# EAGLE board Universal Bicore (rev A) - 1x3 panelized (EAGLE 6.4)
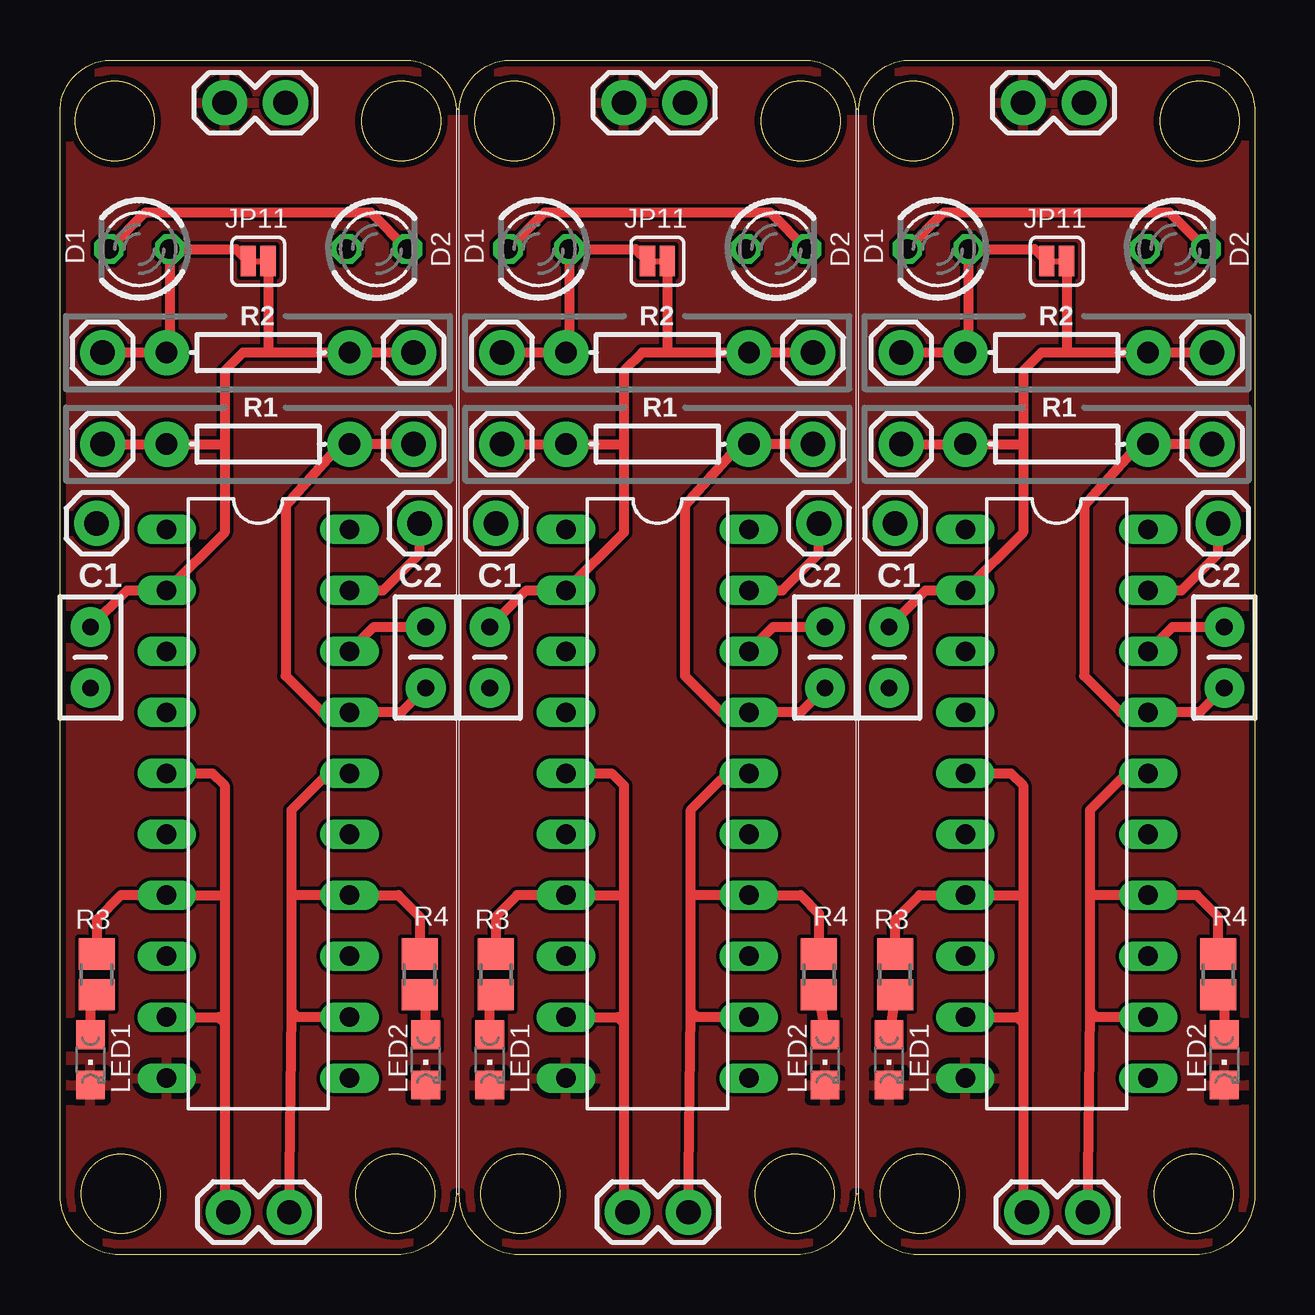
[diagram p0: board, top side]
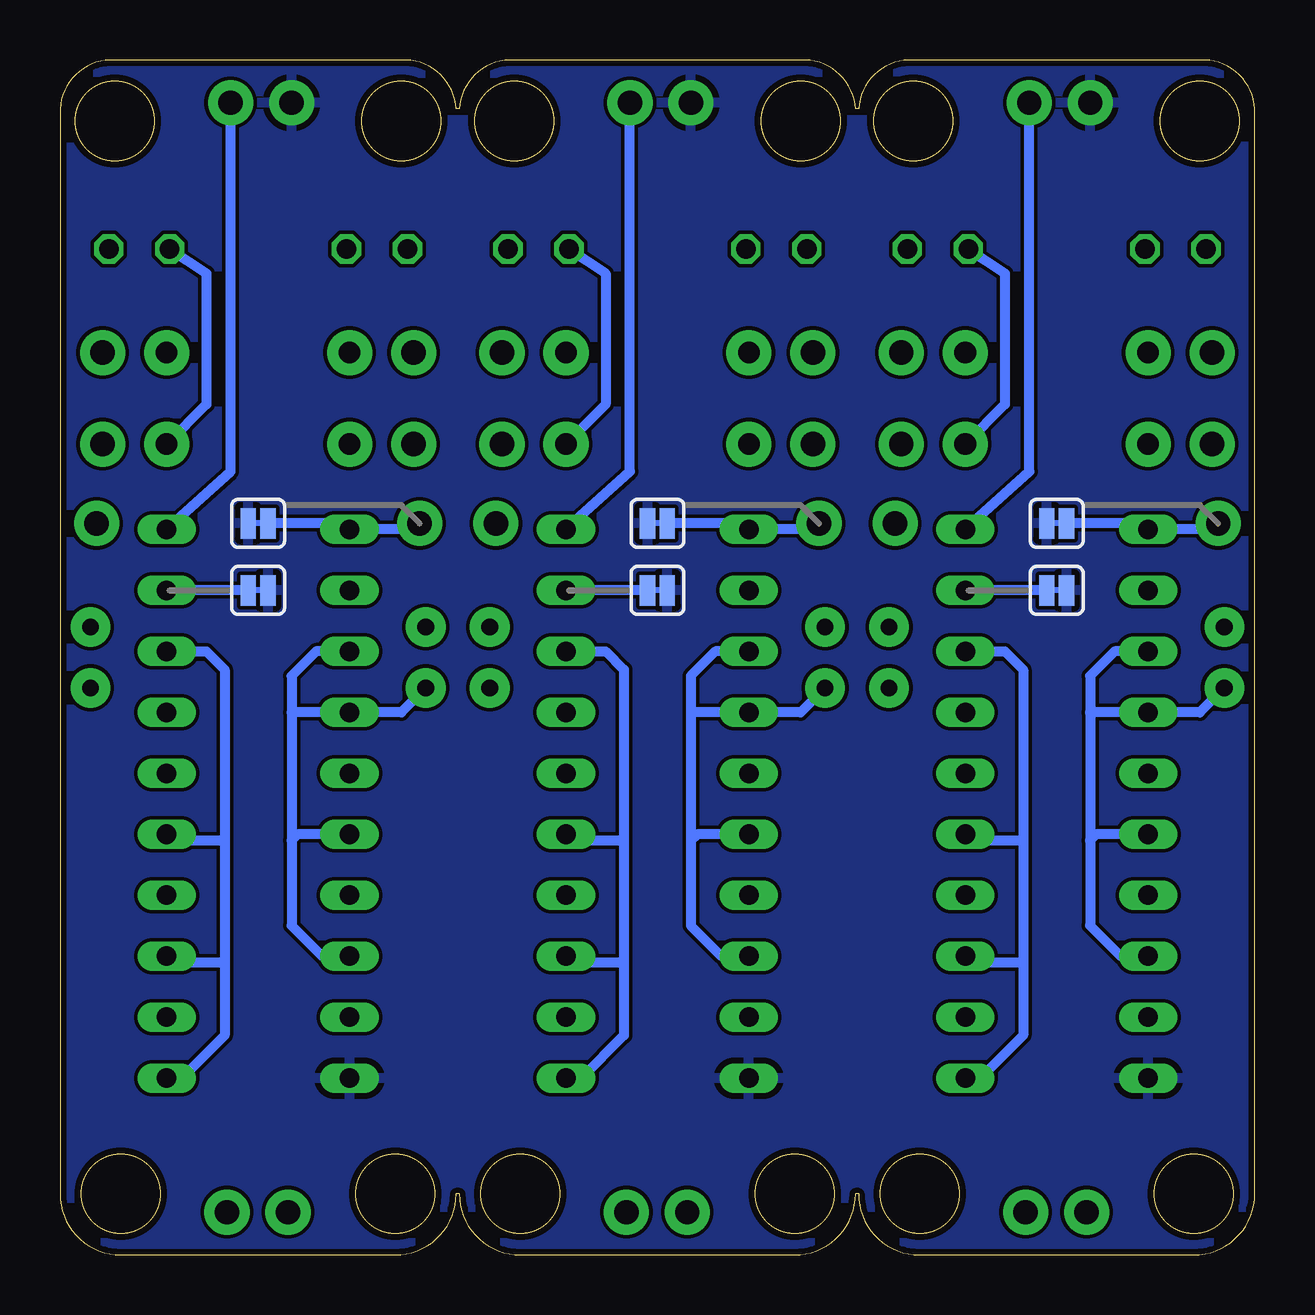
[diagram p1: board, bottom side, seen from below]

Size 49.78 x 49.79 mm. Coordinates in mm from the lower left corner, seen from the top.
Outline: 0,47.75 arc-90 2.29,49.78 14.22,49.78 arc-90 16.51,47.75 16.64,47.75 arc-90 18.92,49.78 30.86,49.78 arc-90 33.15,47.75 33.27,47.75 arc-90 35.56,49.78 47.5,49.78 arc-90 49.78,47.75 49.78,2.54 arc-90 47.24,0 35.81,0 arc-90 33.27,2.54 33.15,2.54 arc-90 30.61,0 19.18,0 arc-90 16.64,2.54 16.51,2.54 arc-90 13.97,0 2.54,0 arc-90 0,2.54 0,47.75
Outline: circle at 2.54,2.54 radius 1.65
Outline: circle at 13.97,2.54 radius 1.65
Outline: circle at 14.22,47.24 radius 1.65
Outline: circle at 2.29,47.24 radius 1.65
Outline: circle at 35.81,2.54 radius 1.65
Outline: circle at 47.24,2.54 radius 1.65
Outline: circle at 47.5,47.24 radius 1.65
Outline: circle at 35.56,47.24 radius 1.65
Outline: circle at 19.18,2.54 radius 1.65
Outline: circle at 30.61,2.54 radius 1.65
Outline: circle at 30.86,47.24 radius 1.65
Outline: circle at 18.92,47.24 radius 1.65
Copper layers (1*2*15*16): Top 0.035mm / dielectric 0.2mm / layer 2 0.0175mm / dielectric 1.1mm / layer 15 0.0175mm / dielectric 0.2mm / Bottom 0.035mm
Design rules "SeeedStudio_DRU_no_angle_20130527": minimum track width 6mil, minimum drill 12mil, track to track 6mil, track to pad 6mil, pad to pad 6mil, via to via 6mil, smd to smd 0mil, copper to edge 10mil, drill to drill 10mil, minimum pad ring 6mil, minimum via ring 6mil, stop-mask expansion 2mil, vias tented up to drill 25mil, thermal gap 10mil

## Footprints (pad centres in the part's own frame; a part is rotated, then mirrored left to right if it is on the bottom)
CAP-PTH-SMALLEZ = drill 0.7 pad 1.651: 1 0,0; 2 2.54,0
LED3MM = drill 0.813 octagon: A -1.27,0; K 1.27,0
DIL20 = drill 0.813 long: 1 -11.43,-3.81; 2 -8.89,-3.81; 3 -6.35,-3.81; 4 -3.81,-3.81; 5 -1.27,-3.81; 6 1.27,-3.81; 7 3.81,-3.81; 8 6.35,-3.81; 9 8.89,-3.81; 10 11.43,-3.81; 11 11.43,3.81; 12 8.89,3.81; 13 6.35,3.81; 14 3.81,3.81; 15 1.27,3.81; 16 -1.27,3.81; 17 -3.81,3.81; 18 -6.35,3.81; 19 -8.89,3.81; 20 -11.43,3.81
1X02 = drill 1.016 pad 1.88: 1 0,0; 2 2.54,0
1X01 = drill 1.016 pad 1.88: 1 0,0
SJ_2S = smd 0.635 x 1.27: 1 -0.412,0; 2 0.412,0
CHIPLED_0805 = smd 1.2 x 1.2: A 0,-1.05; C 0,1.05
AXIAL-0.3EZ = drill 0.9 pad 1.88: P$1 -3.81,0; P$2 3.81,0
R0805 = smd 1.3 x 1.5: 1 -0.85,0; 2 0.85,0

## Placement (x,y rotation side)
C1  .22uF  [CAP-PTH-SMALLEZ]  1.27,26.16 270 top
C2  .22uF  [CAP-PTH-SMALLEZ]  15.24,26.16 270 top
C3  .22uF  [CAP-PTH-SMALLEZ]  34.54,26.16 270 top
C4  .22uF  [CAP-PTH-SMALLEZ]  48.51,26.16 270 top
C5  .22uF  [CAP-PTH-SMALLEZ]  17.91,26.16 270 top
C6  .22uF  [CAP-PTH-SMALLEZ]  31.88,26.16 270 top
D1  [LED3MM]  3.3,41.91 180 top
D2  [LED3MM]  13.21,41.91 0 top
D3  [LED3MM]  36.58,41.91 180 top
D4  [LED3MM]  46.48,41.91 0 top
D5  [LED3MM]  19.94,41.91 180 top
D6  [LED3MM]  29.84,41.91 0 top
IC1  74HCT240N  [DIL20]  8.26,18.8 270 top
IC2  74HCT240N  [DIL20]  41.53,18.8 270 top
IC3  74HCT240N  [DIL20]  24.89,18.8 270 top
JP1  [1X02]  9.4,48.01 180 top
JP2  OUTPUT  [1X02]  9.55,1.78 180 top
JP3  [1X01]  1.78,33.78 0 top
JP4  [1X01]  14.73,33.78 0 top
JP5  [1X01]  1.78,37.59 0 top
JP6  [1X01]  14.73,37.59 90 top
JP7  [1X01]  1.52,30.48 0 top
JP8  [1X01]  14.99,30.48 90 top
JP9  [SJ_2S]  8.26,30.48 0 bottom
JP10  [SJ_2S]  8.26,27.69 180 bottom
JP11  [SJ_2S]  8.26,41.4 0 top
JP12  [1X02]  42.67,48.01 180 top
JP13  OUTPUT  [1X02]  42.82,1.78 180 top
JP14  [1X01]  35.05,33.78 0 top
JP15  [1X01]  48.01,33.78 0 top
JP16  [1X01]  35.05,37.59 0 top
JP17  [1X01]  48.01,37.59 90 top
JP18  [1X01]  34.8,30.48 0 top
JP19  [1X01]  48.26,30.48 90 top
JP20  [SJ_2S]  41.53,30.48 0 bottom
JP21  [SJ_2S]  41.53,27.69 180 bottom
JP22  [SJ_2S]  41.53,41.4 0 top
JP23  [1X02]  26.04,48.01 180 top
JP24  OUTPUT  [1X02]  26.19,1.78 180 top
JP25  [1X01]  18.41,33.78 0 top
JP26  [1X01]  31.37,33.78 0 top
JP27  [1X01]  18.41,37.59 0 top
JP28  [1X01]  31.37,37.59 90 top
JP29  [1X01]  18.16,30.48 0 top
JP30  [1X01]  31.62,30.48 90 top
JP31  [SJ_2S]  24.89,30.48 0 bottom
JP32  [SJ_2S]  24.89,27.69 180 bottom
JP33  [SJ_2S]  24.89,41.4 0 top
LED1  [CHIPLED_0805]  1.27,8.13 180 top
LED2  [CHIPLED_0805]  15.24,8.13 180 top
LED3  [CHIPLED_0805]  34.54,8.13 180 top
LED4  [CHIPLED_0805]  48.51,8.13 180 top
LED5  [CHIPLED_0805]  17.91,8.13 180 top
LED6  [CHIPLED_0805]  31.88,8.13 180 top
R1  [AXIAL-0.3EZ]  8.26,33.78 180 top
R2  [AXIAL-0.3EZ]  8.26,37.59 0 top
R3  470  [R0805]  1.52,11.68 90 top
R4  470  [R0805]  14.99,11.68 90 top
R5  [AXIAL-0.3EZ]  41.53,33.78 180 top
R6  [AXIAL-0.3EZ]  41.53,37.59 0 top
R7  470  [R0805]  34.8,11.68 90 top
R8  470  [R0805]  48.26,11.68 90 top
R9  [AXIAL-0.3EZ]  24.89,33.78 180 top
R10  [AXIAL-0.3EZ]  24.89,37.59 0 top
R11  470  [R0805]  18.16,11.68 90 top
R12  470  [R0805]  31.62,11.68 90 top

## Library data of the parts
C1-C6 = SparkFun-Capacitors
D1-D6 LED1-LED6 = led
IC1-IC3 = 74xx-eu
JP1-JP8 JP12-JP19 JP23-JP30 = SparkFun-Connectors
JP9-JP11 JP20-JP22 JP31-JP33 = SparkFun-Passives
R1 R2 R5 R6 R9 R10 = SparkFun-Resistors
R3 R4 R7 R8 R11 R12 = resistor

## Nets
GND: IC1.10 IC2.10 IC3.10 JP1.2 JP9.1 JP10.1 JP12.2 JP20.1 JP21.1 JP23.2 JP31.1 JP32.1 LED1.C LED2.C LED3.C LED4.C LED5.C LED6.C
N$1: C1.1 IC1.2 JP3.1 JP6.1 JP11.2 R1.P$2 R2.P$2
N$2: C1.2 IC1.3 IC1.4 IC1.6 IC1.8
N$3: IC1.12 IC1.14 IC1.16 JP2.1 R4.2
N$4: C2.1 IC1.11 IC1.13 IC1.15 IC1.18
N$5: C2.2 D2.A IC1.17 JP4.1 R1.P$1
N$6: IC1.5 IC1.7 IC1.9 JP2.2 R3.2
N$7: D1.A JP5.1 JP11.1 R2.P$1
N$8: D1.K D2.K
N$9: LED2.A R4.1
N$10: LED1.A R3.1
N$11: IC1.1 JP7.1 JP9.2
N$12: IC1.19 JP8.1 JP10.2
N$16: C3.1 IC2.2 JP14.1 JP17.1 JP22.2 R5.P$2 R6.P$2
N$17: C3.2 IC2.3 IC2.4 IC2.6 IC2.8
N$18: C4.1 IC2.11 IC2.13 IC2.15 IC2.18
N$19: C4.2 D4.A IC2.17 JP15.1 R5.P$1
N$20: IC2.12 IC2.14 IC2.16 JP13.1 R8.2
N$21: IC2.5 IC2.7 IC2.9 JP13.2 R7.2
N$22: D3.A JP16.1 JP22.1 R6.P$1
N$23: D3.K D4.K
N$24: LED4.A R8.1
N$25: LED3.A R7.1
N$26: IC2.19 JP19.1 JP21.2
N$27: IC2.1 JP18.1 JP20.2
N$31: C5.1 IC3.2 JP25.1 JP28.1 JP33.2 R9.P$2 R10.P$2
N$32: C5.2 IC3.3 IC3.4 IC3.6 IC3.8
N$33: C6.1 IC3.11 IC3.13 IC3.15 IC3.18
N$34: C6.2 D6.A IC3.17 JP26.1 R9.P$1
N$35: IC3.12 IC3.14 IC3.16 JP24.1 R12.2
N$36: IC3.5 IC3.7 IC3.9 JP24.2 R11.2
N$37: D5.A JP27.1 JP33.1 R10.P$1
N$38: D5.K D6.K
N$39: LED6.A R12.1
N$40: LED5.A R11.1
N$41: IC3.19 JP30.1 JP32.2
N$42: IC3.1 JP29.1 JP31.2
VCC: IC1.20 JP1.1
VCC1: IC2.20 JP12.1
VCC2: IC3.20 JP23.1

## Tracks (layer width: path | path; a pad name or v marks a point on that pad's centre or on a via)
GND
  pour Top: -0.51,-0.51 50.29,-0.51 50.29,50.29 -0.51,50.29
  pour Bottom: -0.51,-0.51 50.29,-0.51 50.29,50.29 -0.51,50.29
N$1
  Top 0.406: JP6.1 R2.P$2 8.64,37.59 | JP3.1 R1.P$2 6.86,33.78 | C1.1 2.79,27.69 IC1.2 6.86,30.1 6.86,33.78 | 8.64,37.59 7.62,37.59 6.86,36.83 6.86,33.78 | JP11.2 8.67,37.62 8.64,37.59
N$2
  Bottom 0.406: 6.86,22.61 6.86,24.13 5.84,25.15 IC1.3 | 6.86,22.61 6.86,17.27 | 6.86,17.27 6.86,13.72 5.59,12.45 IC1.8 | IC1.6 6.6,17.53 6.86,17.27 | 6.86,22.61 IC1.4 2.29,22.61 C1.2
N$3
  Top 0.406: JP2.1 9.65,10.16 | 9.65,10.16 9.65,14.99 | 9.65,14.99 9.65,18.54 10.92,19.81 11.81,19.81 IC1.16 | 9.65,14.99 IC1.14 14.1,14.99 14.99,14.1 R4.2 | IC1.12 9.91,9.91 9.65,10.16
N$4
  Top 0.406: IC1.18 13.08,26.16 C2.1
  Bottom 0.406: IC1.18 10.41,25.15 9.65,24.38 9.65,17.27 | 9.65,17.27 9.65,12.19 | 9.65,12.19 9.65,9.14 11.43,7.37 IC1.11 | IC1.13 11.81,12.19 9.65,12.19 | IC1.15 11.81,17.27 9.65,17.27
N$5
  Top 0.406: JP4.1 R1.P$1 11.68,33.78 9.4,31.24 9.4,24.13 10.92,22.61 IC1.17 14.22,22.61 C2.2
  Bottom 0.406: D2.A 10.41,40.89 10.41,35.43 R1.P$1
N$6
  Top 0.406: 6.86,14.99 6.86,19.56 6.35,20.07 IC1.5 | 6.86,14.99 6.86,9.65 | 6.86,9.65 6.86,2.03 JP2.2 | 6.86,9.65 6.6,9.91 IC1.9 | 6.86,14.99 IC1.7 2.54,14.99 1.52,13.97 R3.2
N$7
  Top 0.406: JP5.1 R2.P$1 4.57,37.72 D1.A 7.33,41.91 JP11.1
N$8
  Top 0.406: D1.K 3.56,43.43 12.95,43.43 D2.K
N$9
  Top 0.406: LED2.A 15.24,10.58 R4.1
N$10
  Top 0.406: R3.1 1.27,10.58 LED1.A
N$11
  Bottom 0.406: JP7.1 1.78,30.23 IC1.1 4.7,30.48 JP9.2
N$12
  Top 0.406: IC1.19 13.46,27.69 14.99,29.21 JP8.1
  Bottom 0.406: JP10.2 IC1.19
N$13
  Bottom 0.254: 7.87,30.48 8.64,30.48
N$14
  Bottom 0.254: 7.87,27.69 8.64,27.69
N$15
  Top 0.254: 8.13,41.4 8.38,41.4
N$16
  Top 0.406: JP17.1 R6.P$2 41.91,37.59 | JP14.1 R5.P$2 40.13,33.78 | C3.1 36.07,27.69 IC2.2 40.13,30.1 40.13,33.78 | 41.91,37.59 40.89,37.59 40.13,36.83 40.13,33.78 | JP22.2 41.94,37.62 41.91,37.59
N$17
  Bottom 0.406: 40.13,22.61 40.13,24.13 39.12,25.15 IC2.3 | 40.13,22.61 40.13,17.27 | 40.13,17.27 40.13,13.72 38.86,12.45 IC2.8 | IC2.6 39.88,17.53 40.13,17.27 | 40.13,22.61 IC2.4 35.56,22.61 C3.2
N$18
  Top 0.406: IC2.18 46.35,26.16 C4.1
  Bottom 0.406: IC2.18 43.69,25.15 42.93,24.38 42.93,17.27 | 42.93,17.27 42.93,12.19 | 42.93,12.19 42.93,9.14 44.7,7.37 IC2.11 | IC2.13 45.09,12.19 42.93,12.19 | IC2.15 45.09,17.27 42.93,17.27
N$19
  Top 0.406: JP15.1 R5.P$1 44.96,33.78 42.67,31.24 42.67,24.13 44.2,22.61 IC2.17 47.5,22.61 C4.2
  Bottom 0.406: D4.A 43.69,40.89 43.69,35.43 R5.P$1
N$20
  Top 0.406: JP13.1 42.93,10.16 | 42.93,10.16 42.93,14.99 | 42.93,14.99 42.93,18.54 44.2,19.81 45.09,19.81 IC2.16 | 42.93,14.99 IC2.14 47.37,14.99 48.26,14.1 R8.2 | IC2.12 43.18,9.91 42.93,10.16
N$21
  Top 0.406: 40.13,14.99 40.13,19.56 39.62,20.07 IC2.5 | 40.13,14.99 40.13,9.65 | 40.13,9.65 40.13,2.03 JP13.2 | 40.13,9.65 39.88,9.91 IC2.9 | 40.13,14.99 IC2.7 35.81,14.99 34.8,13.97 R7.2
N$22
  Top 0.406: JP16.1 R6.P$1 37.85,37.72 D3.A 40.61,41.91 JP22.1
N$23
  Top 0.406: D3.K 36.83,43.43 46.23,43.43 D4.K
N$24
  Top 0.406: R8.1 48.51,10.58 LED4.A
N$25
  Top 0.406: R7.1 LED3.A
N$26
  Top 0.406: IC2.19 46.74,27.69 48.26,29.21 JP19.1
  Bottom 0.406: JP21.2 IC2.19
N$27
  Bottom 0.406: JP18.1 35.05,30.23 IC2.1 37.97,30.48 JP20.2
N$28
  Bottom 0.254: 41.15,30.48 41.91,30.48
N$29
  Bottom 0.254: 41.15,27.69 41.91,27.69
N$30
  Top 0.254: 41.4,41.4 41.66,41.4
N$31
  Top 0.406: JP28.1 R10.P$2 25.27,37.59 | JP25.1 R9.P$2 23.5,33.78 | C5.1 19.43,27.69 IC3.2 23.5,30.1 23.5,33.78 | 25.27,37.59 24.26,37.59 23.5,36.83 23.5,33.78 | JP33.2 25.3,37.62 25.27,37.59
N$32
  Bottom 0.406: 23.5,22.61 23.5,24.13 22.48,25.15 IC3.3 | 23.5,22.61 23.5,17.27 | 23.5,17.27 23.5,13.72 22.23,12.45 IC3.8 | IC3.6 23.24,17.53 23.5,17.27 | 23.5,22.61 IC3.4 18.92,22.61 C5.2
N$33
  Top 0.406: IC3.18 29.72,26.16 C6.1
  Bottom 0.406: IC3.18 27.05,25.15 26.29,24.38 26.29,17.27 | 26.29,17.27 26.29,12.19 | 26.29,12.19 26.29,9.14 28.07,7.37 IC3.11 | IC3.13 28.45,12.19 26.29,12.19 | IC3.15 28.45,17.27 26.29,17.27
N$34
  Top 0.406: JP26.1 R9.P$1 28.32,33.78 26.04,31.24 26.04,24.13 27.56,22.61 IC3.17 30.86,22.61 C6.2
  Bottom 0.406: D6.A 27.05,40.89 27.05,35.43 R9.P$1
N$35
  Top 0.406: JP24.1 26.29,10.16 | 26.29,10.16 26.29,14.99 | 26.29,14.99 26.29,18.54 27.56,19.81 28.45,19.81 IC3.16 | 26.29,14.99 IC3.14 30.86,14.99 31.62,14.22 R12.2 | IC3.12 26.54,9.91 26.29,10.16
N$36
  Top 0.406: 23.5,14.99 23.5,19.56 22.99,20.07 IC3.5 | 23.5,14.99 23.5,9.65 | 23.5,9.65 23.5,2.03 JP24.2 | 23.5,9.65 23.24,9.91 IC3.9 | 23.5,14.99 IC3.7 19.05,14.99 18.16,14.1 R11.2
N$37
  Top 0.406: JP27.1 R10.P$1 21.21,37.72 D5.A 23.97,41.91 JP33.1
N$38
  Top 0.406: D5.K 20.19,43.43 29.59,43.43 D6.K
N$39
  Top 0.406: R12.1 LED6.A
N$40
  Top 0.406: LED5.A 17.91,10.58 R11.1
N$41
  Top 0.406: IC3.19 30.1,27.69 31.62,29.21 JP30.1
  Bottom 0.406: JP32.2 IC3.19
N$42
  Bottom 0.406: JP29.1 18.41,30.23 IC3.1 21.34,30.48 JP31.2
N$43
  Bottom 0.254: 24.51,30.48 25.27,30.48
N$44
  Bottom 0.254: 24.51,27.69 25.27,27.69
N$45
  Top 0.254: 24.77,41.4 25.02,41.4
VCC
  Bottom 0.406: IC1.20 9.4,32.64 JP1.1
VCC1
  Bottom 0.406: IC2.20 42.67,32.64 JP12.1
VCC2
  Bottom 0.406: IC3.20 26.04,32.64 JP23.1

## Text on the board
tPlace: JP11 | JP11 | JP11 | D1 | D2 | D1 | D2 | D1 | D2 | R2 | R2 | R2 | R1 | R1 | R1 | C1 | C2 | C1 | C2 | C1 | C2 | R3 | R4 | R3 | R4 | R3 | R4 | LED1 | LED2 | LED1 | LED2 | LED1 | LED2
tDocu: - | + | - | + | - | + | POWER | POWER | POWER | RIGHT | RIGHT | RIGHT | LEFT | LEFT | LEFT | L | R | L | R | L | R
bDocu: - | - | - | + | + | + | rev A | rev A | rev A | EO1 | EO1 | EO1 | EO2 | EO2 | EO2 | UNIVERSAL BICORE | UNIVERSAL BICORE | UNIVERSAL BICORE | http://jason-webb.info | http://jason-webb.info | http://jason-webb.info | Designed by Jason Webb | Designed by Jason Webb | Designed by Jason Webb | L | R | L | R | L | R